# EAGLE board BC847BSBREAKOUT (EAGLE 7.5.0)
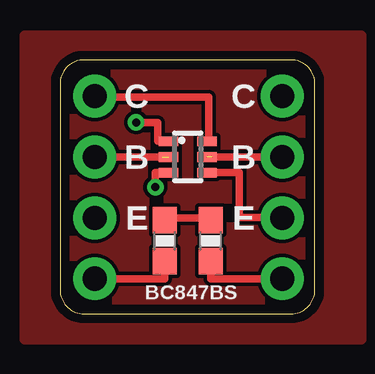
[diagram p0: board, top side]
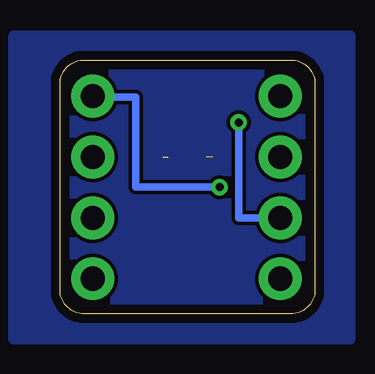
[diagram p1: board, bottom side, seen from below]

Size 10.62 x 10.59 mm. Coordinates in mm from the lower left corner, seen from the top.
Outline: 0,9.59 0,1 arc90 1,0 9.62,0 arc90 10.62,1 10.62,9.59 arc90 9.62,10.59 1,10.59 arc90 0,9.59
Copper layers (1*16): Top 0.0356mm / dielectric 1.5011mm / Bottom 0.0356mm
Design rules "LaenPCBOrder": minimum track width 6mil, minimum drill 13mil, track to track 6mil, track to pad 6mil, pad to pad 6mil, via to via 6mil, smd to smd 6mil, copper to edge 15mil, drill to drill 6mil, minimum pad ring 7mil, minimum via ring 7mil, stop-mask expansion 4mil, vias tented up to drill 0mil, thermal gap 10mil

## Footprints (pad centres in the part's own frame; a part is rotated, then mirrored left to right if it is on the bottom)
1X04-CLEANBIG = drill 1.016 pad 1.778: 1 -3.81,0; 2 -1.27,0; 3 1.27,0; 4 3.81,0
SOT363_PHILIPS = smd 0.4 x 0.8: 1 -0.65,-0.8; 2 0,-0.8; 3 0.65,-0.8; 4 0.65,0.8; 5 0,0.8; 6 -0.65,0.8
0603-RES = smd 1.1 x 1: 1 -0.85,0; 2 0.85,0

## Placement (x,y rotation side)
E$1  [1X04-CLEANBIG]  9.26,5.27 90 top
E$2  [1X04-CLEANBIG]  1.45,5.27 90 top
Q1  Q1  [SOT363_PHILIPS]  5.32,6.54 270 top
R1  220  [0603-RES]  4.37,3.05 90 top
R2  220  [0603-RES]  6.27,3.05 90 top

## Library data of the parts
E$1 E$2 = adafruit
Q1 = transistor-small-signal
R1 R2 = SparkFun-Resistors; PROD_ID: RES-07866

## Nets
N$3: Q1.2
N$4: Q1.5
N$5: Q1.6
N$6: Q1.1
N$7: Q1.3
N$8: Q1.4
S$1: R1.1
S$2: R1.2

## Tracks (layer width: path | path; a pad name or v marks a point on that pad's centre or on a via)
GND
  pour Top: -1.47,11.62 12.56,11.62 12.56,-1.08 -1.47,-1.08
  pour Bottom: -1.47,-1.08 12.56,-1.08 12.56,11.62 -1.47,11.62
N$3  (1 unrouted)
  Top 0.305: 4.26,6.54 1.51,6.54
N$4  (1 unrouted)
  Top 0.305: 6.35,6.54 9.13,6.54
N$9
  Top 0.305: 6.26,5.89 7.47,5.89 7.47,5.01 7.47,4.01 9.07,4.01
N$10
  Top 0.305: 6.14,7.19 6.2,7.19 6.2,9.04 1.55,9.04
N$11  (via drill 0.33 pad 0.25)
  Top 0.305: 4.51,7.2 4.08,7.2 4.08,7.98 v3.18,7.99
  Bottom 0.305: v3.18,7.99 3.18,4 1.55,4 1.4,4
N$12  (via drill 0.33 pad 0.25)
  Top 0.305: 4.41,5.89 3.97,5.89 v3.97,5.28
  Bottom 0.305: v3.97,5.28 7.47,5.28 7.47,9.04 9.17,9.04
N$13
  Top 0.305: 1.51,1.46 3.1,1.46 4.37,1.46 4.37,2.1
N$14
  Top 0.305: 9.13,1.46 7.54,1.46 6.27,1.46 6.27,2.1
S$3
  Top 0.305: 4.37,4 6.27,4

## Text on the board
tPlace: BC847BS
tNames: C | C | B | B | E | E